# Altium PCB Predajnik.PcbDoc
Units mm, origin at the board's own origin, x right, y up, seen from the top; angles counter-clockwise.
Board outline 152.4 x 101.6 mm, 2 copper layers (Top Layer, Bottom Layer); 47 components, 29 nets, 158 pads, 4 vias.
Unrouted connection lines stored in the file: 2.
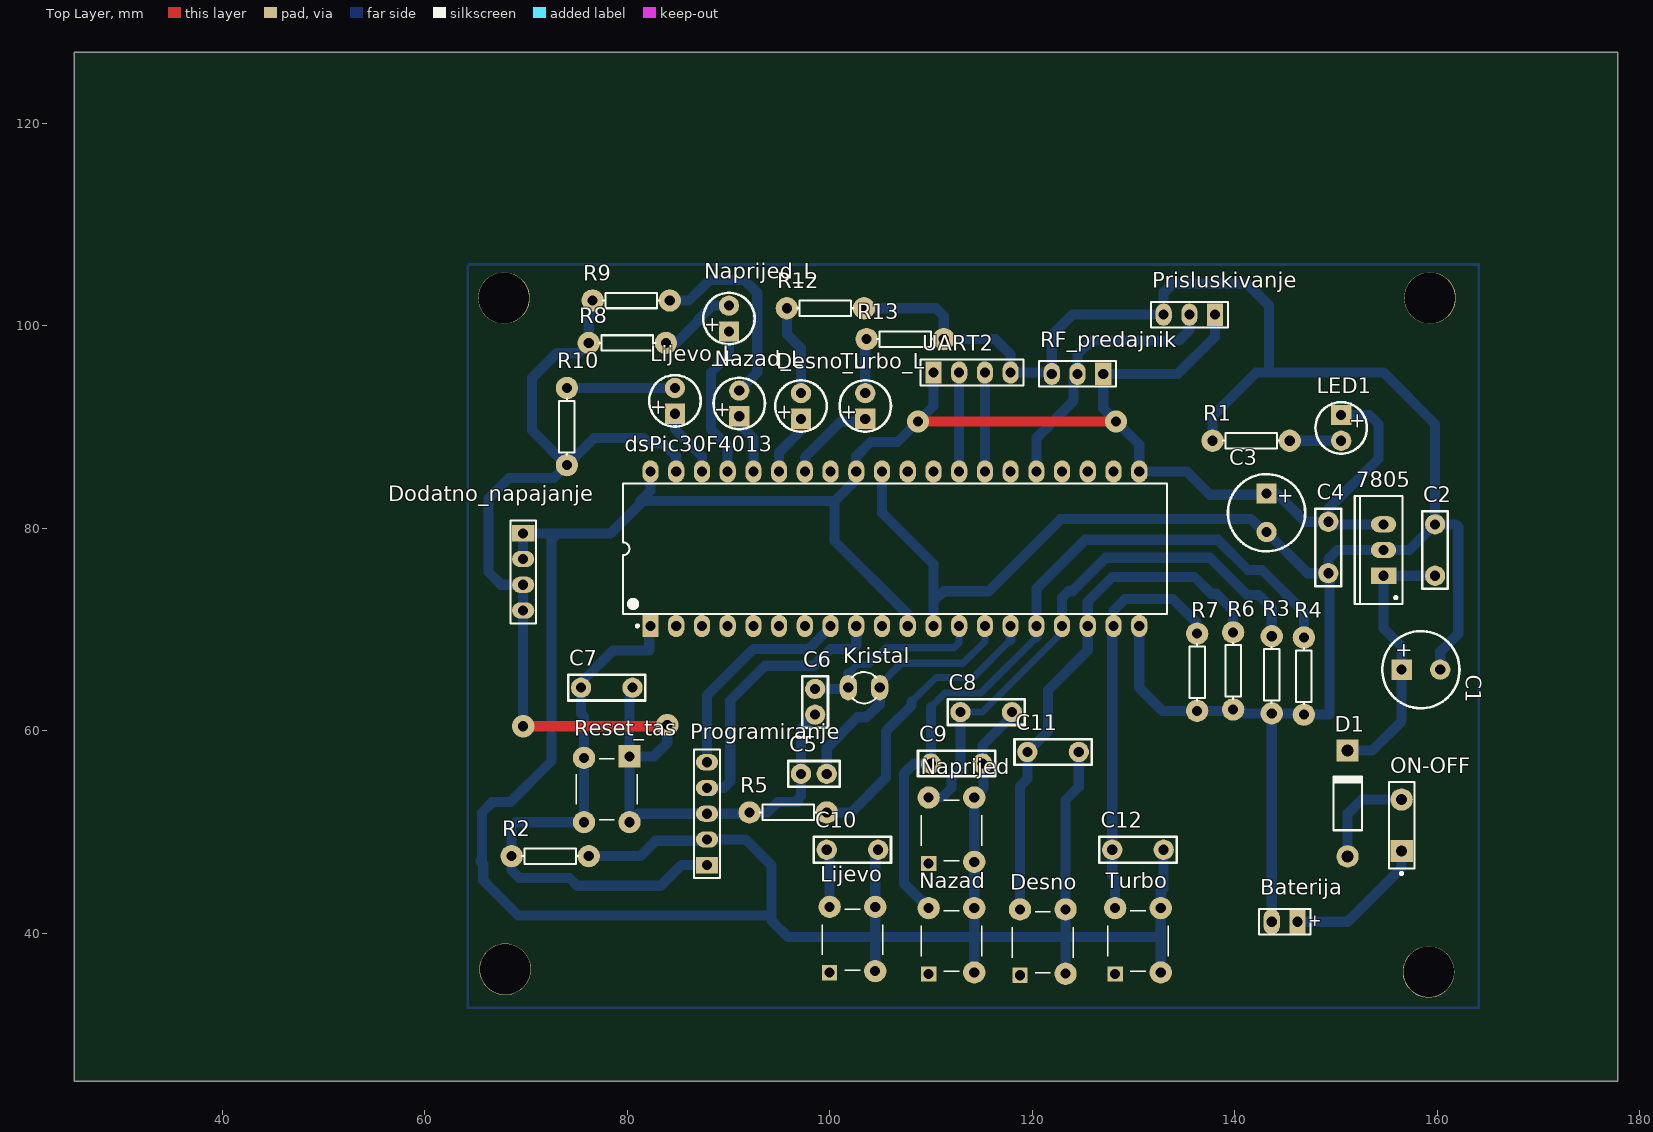
[diagram p0: Top Layer view]
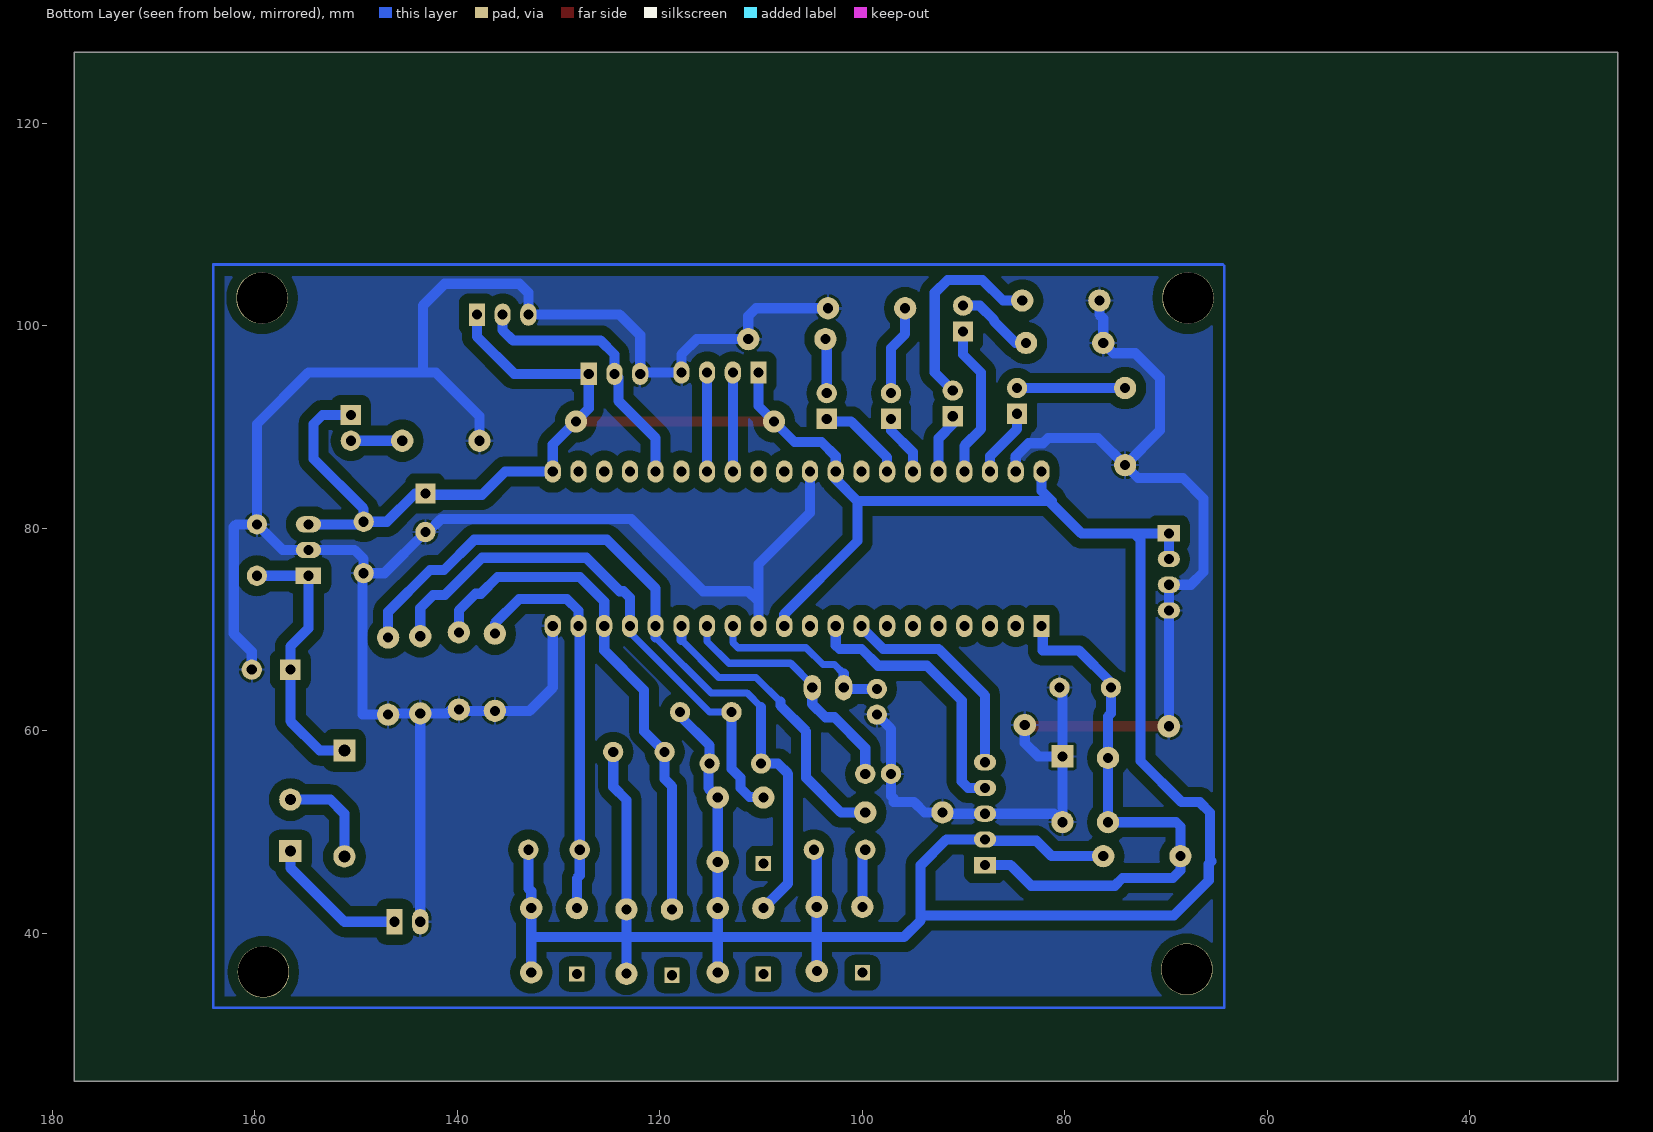
[diagram p1: Bottom Layer view, seen from below]

## Layer stack, top to bottom
Top Solder: solder mask 0.0102, Solder Resist, Dk 3.5
Top Layer: signal copper 0.0356
Dielectric 1: dielectric 0.32, FR-4, Dk 4.8
Bottom Layer: signal copper 0.0356
Bottom Solder: solder mask 0.0102, Solder Resist, Dk 3.5

## Board outline
25.4,25.4 177.8,25.4 177.8,127 25.4,127

## Design rules (kind name [scope] priority, off if disabled: settings)
Clearance [All vs InPolygon] p1: gap=1 ignorepadtopadclearanceinfootprint=FALSE
PolygonConnect [All] p1: connectstyle=Relief reliefconductorwidth=0.254 reliefentries=4 polygonreliefangle="90 Angle" airgapwidth=0.254
RoutingVias [All] p1: holewidth=0.711 width=1.27 viastyle="Through Hole" minholewidth=0.711 minwidth=1.27 maxholewidth=0.711 maxwidth=1.27
SolderMaskExpansion [All] p1: expansion=0.102
Width [InNetClass('All Nets')] p1: maxlimit=1.5 minlimit=0.4 preferedwidth=1
30 further rules are at their usual default settings.

## Components (designator, comment, footprint, x,y, rotation, side; value= is the part's Value field where it differs from the comment)
7805 "LM7805CT" T03B 154.686,77.851 r90 top
Baterija "9V" BAT-2 144.907,41.148 r180 top
C1 "470uF" "El. Kondenzator 470uf" 158.369,66.04 r0 top
C2 "100nF" "C blok 100n" 159.766,77.851 r90 top
C3 "470uF" "El. Kondenzator 470uf" 143.129,81.534 r270 top
C4 "100nF" "C blok 100n" 149.225,78.105 r270 top
C5 "33pF" "C keramicki 30pF" 98.425,55.753 r0 top
C6 "33pF" "C keramicki 30pF" 98.552,62.865 r90 top
C7 "100nF" "C blok 100n" 77.978,64.262 r0 top
C8 "100nF" "C blok 100n" 115.443,61.849 r180 top
C9 "100nF" "C blok 100n" 112.522,56.769 r180 top
C10 "100nF" "C blok 100n" 102.235,48.26 r180 top
C11 "100nF" "C blok 100n" 122.047,57.912 r180 top
C12 "100nF" "C blok 100n" 130.429,48.26 r180 top
D1 "1N4007" DO-41 151.13,52.832 r90 top
Desno "3-1825910-1" *TE_3-1825910-1#1 121.031,39.116 r90 top
Desno_L "LED0" LED_5mm 97.155,92.075 r90 top
Dodatno_napajanje "" HDR1X4 69.723,79.502 r270 top
dsPic30F4013 "DSPIC30F4013-20E/P" PDIP600-P40 106.426,77.978 r90 top
Kristal "10MHz" R38 103.378,64.262 r90 top
LED1 "LED_regulatora" LED_5mm 150.495,89.916 r270 top
Lijevo "3-1825910-1" *TE_3-1825910-1#1 102.235,39.37 r90 top
Lijevo_L "LED0" LED_5mm 84.709,92.583 r90 top
Naprijed "3-1825910-1" *TE_3-1825910-1#1 112.014,50.165 r90 top
Naprijed_L "LED0" LED_5mm 90.043,100.711 r90 top
Nazad "3-1825910-1" *TE_3-1825910-1#1 112.014,39.243 r90 top
Nazad_L "LED0" LED_5mm 91.059,92.329 r90 top
ON-OFF "Prekidac" SPST-2 156.464,50.673 r90 top
Prisluskivanje "Tx_na_Rx_MAX-a" HDR1X3 138.049,101.092 r180 top
Programiranje "Pinovi" HDR1X5 87.884,46.736 r90 top
R1 "660" AXIAL-0.3 141.605,88.646 r0 top
R2 "10k" AXIAL-0.3 72.39,47.625 r0 top value=10K
R3 "10k" AXIAL-0.3 143.637,65.532 r90 top value=10K
R4 "10k" AXIAL-0.3 146.812,65.405 r90 top value=10K
R5 "10k" AXIAL-0.3 95.885,51.943 r0 top value=10K
R6 "10k" AXIAL-0.3 139.827,65.913 r90 top value=10K
R7 "10k" AXIAL-0.3 136.271,65.786 r90 top value=10K
R8 "220" AXIAL-0.3 80.01,98.298 r180 top
R9 "220" AXIAL-0.3 80.391,102.489 r180 top
R10 "220" AXIAL-0.3 74.041,90.043 r270 top
R12 "220" AXIAL-0.3 99.568,101.727 r0 top
R13 "220" AXIAL-0.3 107.442,98.679 r0 top
Reset_tas "3-1825910-1" *TE_3-1825910-1#2 77.978,54.229 r270 top
RF_predajnik "Header 3" HDR1X3 127,95.25 r180 top
Turbo "3-1825910-1" *TE_3-1825910-1#1 130.429,39.243 r90 top
Turbo_L "LED0" LED_5mm 103.505,92.075 r90 top
UART2 "" HDR1X4 110.236,95.377 r0 top

## Footprints (in the part's own frame and the unit in brackets; to place one, negate y for a bottom-side part, rotate by r counter-clockwise, add the part's x,y. Pads: shape width x height; smd on the part's side, far side on the other; paste and mask are expansions set on the pad)
*TE_3-1825910-1#1 [mm]
  rect 1.498x1.498 hole 0.99: 1(-3.25,2.25)
  round 2.2 hole 1: 2(3.25,2.25) 4(3.25,-2.25)
  round 2.2 hole 0.99: 3(-3.1,-2.25)
  silkscreen extent -3,-3 3,3
*TE_3-1825910-1#2 [mm]
  rect 2.2x2.2 hole 0.99: 1(-3.25,2.25)
  round 2.2 hole 1: 2(3.25,2.25) 4(3.25,-2.25)
  round 2.2 hole 0.99: 3(-3.1,-2.25)
  silkscreen extent -3,-3 3,3
AXIAL-0.3 [mm] "Axial Device, Thru-Hole; 2 Leads; 0.3 in Pin Spacing"
  round 2.2 hole 1: 1(-3.81,0) 2(3.81,0)
  silkscreen extent -2.77,-0.76 2.77,0.76
BAT-2 [mm] "Battery; 2 Leads"
  rect 1.6x2.5 hole 1: 1(-1.27,0)
  oval 1.6x2.5 hole 1: 2(1.27,0)
  silkscreen extent -2.54,-1.27 2.54,1.27
"C blok 100n" [mm]
  round 2 hole 1: 1(2.54,0) 2(-2.54,0)
  silkscreen extent -3.81,-1.27 3.81,1.27
"C keramicki 30pF" [mm]
  round 2 hole 1: 1(-1.27,0) 2(1.27,0)
  silkscreen extent -2.54,-1.27 2.54,1.27
DO-41 [mm] "Diode, Axial; Body 5.2 x 2.7 mm (LxDia. max), Lead Dia. 0.86 mm (max)"
  round 2.2 hole 1.2 unplated: 1(-5.23,0)
  rect 2.2x2.2 hole 1.2 unplated: 2(5.23,0)
  silkscreen extent -2.65,-1.4 2.75,1.4
"El. Kondenzator 470uf" [mm]
  rect 2x2 hole 1: 1(-1.905,0)
  round 2 hole 1: 2(1.905,0)
  silkscreen extent -3.81,-3.81 3.81,3.81
HDR1X3 [mm] "Connector; Header; 3 Position"
  rect 1.6x2.2 hole 1: 1(0,0)
  oval 1.6x2.2 hole 1: 2(2.54,0) 3(5.08,0)
  silkscreen extent -1.27,-1.27 6.35,1.27
HDR1X4 [mm] "Connector; Header; 4 Position"
  rect 1.6x2.2 hole 1: 1(0,0)
  oval 1.6x2.2 hole 1: 2(2.54,0) 3(5.08,0) 4(7.62,0)
  silkscreen extent -1.27,-1.27 8.89,1.27
HDR1X5 [mm] "Connector; Header; 5 Position"
  rect 1.6x2.2 hole 1: 1(0,0)
  oval 1.6x2.2 hole 1: 2(2.54,0) 3(5.08,0) 4(7.62,0) 5(10.16,0)
  silkscreen extent -1.27,-1.27 11.43,1.27
LED_5mm [mm]
  rect 2x2 hole 1: 1(-1.27,0)
  round 2 hole 1: 2(1.27,0)
  silkscreen extent -2.54,-2.54 2.54,2.54
PDIP600-P40 [mm] "DIP, 40-Leads, Row Spacing 15.24mm, Pitch 2.54mm, Body 51.8x13.5mm"
  rect 2.2x1.6 hole 1: 1(-7.62,24.13)
  oval 2.2x1.6 hole 1: 2(-7.62,21.59) 3(-7.62,19.05) 4(-7.62,16.51) 5(-7.62,13.97) 6(-7.62,11.43) 7(-7.62,8.89) 8(-7.62,6.35) 9(-7.62,3.81) 10(-7.62,1.27) 11(-7.62,-1.27) 12(-7.62,-3.81) 13(-7.62,-6.35) 14(-7.62,-8.89) 15(-7.62,-11.43) 16(-7.62,-13.97) 17(-7.62,-16.51) 18(-7.62,-19.05) 19(-7.62,-21.59) 20(-7.62,-24.13) 21(7.62,-24.13) 22(7.62,-21.59) 23(7.62,-19.05) 24(7.62,-16.51) 25(7.62,-13.97) 26(7.62,-11.43) 27(7.62,-8.89) 28(7.62,-6.35) 29(7.62,-3.81) 30(7.62,-1.27) 31(7.62,1.27) 32(7.62,3.81) 33(7.62,6.35) 34(7.62,8.89) 35(7.62,11.43) 36(7.62,13.97) 37(7.62,16.51) 38(7.62,19.05) 39(7.62,21.59) 40(7.62,24.13)
  silkscreen extent -7.74,-26.85 6.45,26.85, body extent -7.3,-26.85 7.3,26.85, height 6.35
R38 [mm] "Crystal, Thru-Hole; 2 Leads; Body 3.1 x 8.2 mm (Dia.xH)"
  oval 2.5x1.7 hole 1: 1(0,1.55) 2(0,-1.55)
  silkscreen extent -1.55,-1.19 1.55,1.17
SPST-2 [mm] "Switch; 2 Leads"
  rect 2.2x2.2 hole 1.1: 1(-2.54,0)
  round 2.2 hole 1.1: 2(2.54,0)
  silkscreen extent -4.89,-1.27 4.28,1.27
T03B [mm] "TO, Thru-Hole, Vertical, Heatsink Mounted; 3 In-Line Leads; Pitch 2.54 mm"
  rect 1.6x2.5 hole 1: 1(-2.54,0)
  oval 1.6x2.5 hole 1: 2(0,0) 3(2.54,0)
  silkscreen extent -5.35,-1.85 5.35,2.85, body extent -5.4,-1.9 5.4,2.9, height 19.4

## Part data
7805: library part LM7905CT, "3-Terminal Negative Regulator, 3-pin TO-220", Manufacturer="National Semiconductor", PackageTopMarking=NSUZXYTTE#*LM7905CT, PowerWise=N, Supplier Part Number 1=9490370, ComponentLink1Description="LM7905 Datasheet", ComponentLink1URL=http://www.national.com/ds/LM/LM7905.pdf, ComponentLink2Description="LM7905 Web Page", ComponentLink2URL=http://www.national.com/pf/LM/LM7905.html, ComponentLink3Description="T03B Package Page", ComponentLink3URL=http://www.national.com/packaging/folders/t03b.html, CompType="LDO IC", DatasheetVersion=Sep-2001, PackageDescription="TO-220, Molded, 3 Lead, Straight", PackageReference=T03B, PackageVersion="revL, Jan-1992", PartNumber=LM7905CT, PinCount=3, Published=4-Dec-2008, Publisher="Altium Limited", RoHS=N, Supplier 1=Farnell
Baterija: library part Battery, "Multicell Battery", LatestRevisionDate=17-Jul-2002, LatestRevisionNote="Re-released for DXP Platform.", PackageDescription="Battery; 2 Leads", PackageReference=BAT-2, Published=24-Mar-1999, Publisher="Altium Limited"
C1 C3: library part "Cap Pol1", "Polarized Capacitor (Radial)", LatestRevisionDate=17-Jul-2002, LatestRevisionNote="Re-released for DXP Platform.", PackageDescription="Polarized Capacitor (Radial); 2 Leads", PackageReference=RB7.6-15, Published=8-Jun-2000, Publisher="Altium Limited"
C2 C4 C5 C6 C7 C8 C9 C10 C11 C12: library part Cap, "Capacitor", LatestRevisionDate=17-Jul-2002, LatestRevisionNote="Re-released for DXP Platform.", PackageDescription="Radial Cap, Thru-Hole; 2 Leads; 0.3 in Pin Spacing", PackageReference=RAD-0.3, Published=8-Jun-2000, Publisher="Altium Limited"
D1: library part "Diode 1N4007", "1 Amp General Purpose Rectifier", Code_JEDEC=DO-204-AL, ComponentLink1Description="Manufacturer Link", ComponentLink1URL=http://www.fairchildsemi.com/, ComponentLink2Description=Datasheet, ComponentLink2URL=http://www.fairchildsemi.com/ds/1N%2F1N4001.pdf, DatasheetVersion=1998, LatestRevisionDate=17-Jul-2002, LatestRevisionNote="Re-released for DXP Platform.", PackageDescription="Diode, Axial; Body 5.2 x 2.7 mm (LxDia. max), Lead Dia. 0.86 mm (max)", PackageReference=DO-41, PackageVersion=Aug-1999, Published=8-Jun-2000, Publisher="Altium Limited"
Desno Lijevo Naprijed Nazad Reset_tas Turbo: "Switch Push Button OFF _ON_ SPST Round Button 0.05A 24VDC Momentary Contact PC Pins Thru-Hole", Package=None, Availability=Unavailable, EU_RoHS_Compliance=Compliant, MF="TE Connectivity", MP=3-1825910-1, Price=None, SnapEDA_Link=https://www.snapeda.com/parts/3-1825910-1/TE%20Connectivity%20ALCOSWITCH%20Switches/view-part/452461/?ref=snap, TE_purchase_URL=https://www.te.com/usa-en/product-3-1825910-1.html?te_bu=Cor&te_type=disp&te_campaign=seda_glo_cor-seda-global-disp-prtnr-fy19-seda-model-bom-cta_sma-317_1&elqCampaignId=32493
Desno_L Lijevo_L Naprijed_L Nazad_L Turbo_L: "Typical INFRARED GaAs LED", LatestRevisionDate=08-Jul-2005, LatestRevisionNote="Mech Layer 1 removed.", PackageDescription="LED; 2 Leads", PackageReference=LED-0, Published=8-Jun-2000, Publisher="Altium Limited"
Dodatno_napajanje Prisluskivanje UART2: library part "Header 4", "Header, 4-Pin", LatestRevisionDate=17-Jul-2002, LatestRevisionNote="Re-released for DXP Platform.", Publisher="Altium Limited"
dsPic30F4013: "High-Performance 16-bit Digital Signal Controller, 48 KB Flash, 2 KB SRAM, 1 KB EEPROM, 40-Pin PDIP, Extended High Temperature", Supplier Part Number 1=DSPIC30F4013-20EP-ND, ComponentLink1Description=Datasheet, ComponentLink1URL=http://ww1.microchip.com/downloads/en/DeviceDoc/70138F.pdf, ComponentLink2Description="Packaging Specification", ComponentLink2URL=http://www.microchip.com/stellent/groups/techpub_sg/documents/packagingspec/en012702.pdf, ComponentLink3Description="Microchip.com Home", ComponentLink3URL=http://www.microchip.com/, DatasheetVersion="revF, Apr-2008", PackageDescription="40-Lead Plastic Dual In-Line (P) - 600 mil Body [PDIP]", PackageReference=PDIP600-P40, PackageVersion="revBB, Aug-2009", Published=29-Jan-2009, Publisher="Altium Limited", Supplier 1=Digi-Key
Kristal: library part XTAL, "Crystal Oscillator", LatestRevisionDate=17-Jul-2002, LatestRevisionNote="Re-released for DXP Platform.", PackageDescription="Crystal, Thru-Hole; 2 Leads; Body 3.1 x 8.2 mm (Dia.xH)", PackageReference=R38, Published=8-Jun-2000, Publisher="Altium Limited"
LED1: library part LED1, "Typical RED GaAs LED", LatestRevisionDate=08-Jul-2005, LatestRevisionNote="Mech Layer 1 removed.", PackageDescription="LED; 2 Leads", PackageReference=LED-1, Published=8-Jun-2000, Publisher="Altium Limited"
ON-OFF: library part SW-PB, "Switch", LatestRevisionDate=17-Jul-2002, LatestRevisionNote="Re-released for DXP Platform.", PackageDescription="Switch; 2 Leads", PackageReference=SPST-2, Published=24-Mar-1999, Publisher="Altium Limited"
Programiranje: library part "Header 5", "Header, 5-Pin", LatestRevisionDate=17-Jul-2002, LatestRevisionNote="Re-released for DXP Platform.", Publisher="Altium Limited"
R1 R2 R3 R4 R5 R6 R7 R8 R9 R10 R12 R13: library part Res1, "Resistor", LatestRevisionDate=17-Jul-2002, LatestRevisionNote="Re-released for DXP Platform.", PackageDescription="Axial Device, Thru-Hole; 2 Leads; 0.3 in Pin Spacing", PackageReference=AXIAL-0.3, Published=8-Jun-2000, Publisher="Altium Limited"
RF_predajnik: "Header, 3-Pin", LatestRevisionDate=17-Jul-2002, LatestRevisionNote="Re-released for DXP Platform.", Publisher="Altium Limited"

## Free pads (board coordinates)
  round 5.1 hole 5 unplated: 2(159.258,102.743) 3(67.818,102.743) 4(67.945,36.449) 5(159.131,36.195)

## Via types
v1: diameter 2.2, hole 1, Top Layer to Bottom Layer, 4 vias

## Nets (pads, with @x,y where several pads share a name; then routed paths per layer and width w, separated by ;. In a path a pad name is that pad's centre, name@x,y a point inside that pad or via, vN(x,y) a via of type N, cw(c..) or ccw(c..) an arc to the next point about the centre after c; other vN are vias at no path point)
GND: 7805.2 Baterija.2 C1.2 C2.1 C3.2 C4.1 C5.1 C6.1 C7.1 Dodatno_napajanje.3 Dodatno_napajanje.4 dsPic30F4013.12 dsPic30F4013.20 dsPic30F4013.31 dsPic30F4013.39 Prisluskivanje.3 Programiranje.3 R1.1 R3.1 R4.1 R5.1 R6.1 R7.1 R8.2 R9.2 R10.2 R12.2 R13.2 Reset_tas.1 Reset_tas.2 RF_predajnik.3 UART2.4 | length 381.6
  Top Layer w1: v1(69.723,60.452) 83.82,60.452 v1(83.947,60.579)
  Bottom Layer w1: v1(69.723,60.452) Dodatno_napajanje.4 Dodatno_napajanje.3 67.564,74.422 66.294,75.692 66.294,82.931 68.326,84.963 72.771,84.963 R10.2 ; R9.2 76.581,101.092 76.2,100.711 R8.2 75.184,97.282 73.025,97.282 70.612,94.869 70.612,89.662 R10.2 ; C7.1 80.228,63.972 Reset_tas.1 ; v1(83.947,60.579) 83.947,58.801 82.625,57.479 Reset_tas.1 ; dsPic30F4013.39 84.836,87.122 83.566,88.392 82.169,88.392 81.661,88.9 76.708,88.9 R10.2 ; C6.1 97.155,60.198 C5.1 97.155,53.594 96.901,53.34 96.901,52.959 94.869,52.959 93.853,51.943 R5.1 91.948,51.816 Programiranje.3 81.065,51.816 Reset_tas.2 Reset_tas.1 ; R12.2 110.49,101.727 111.252,100.965 R13.2 116.332,98.679 117.856,97.155 UART2.4 121.793,95.377 RF_predajnik.3 121.92,99.06 123.952,101.092 Prisluskivanje.3 132.969,103.251 133.858,104.14 141.224,104.14 143.383,101.981 143.383,95.504 143.51,95.377 ; dsPic30F4013.31 105.156,81.534 110.236,76.454 110.236,72.771 ; dsPic30F4013.12 110.236,72.771 ; dsPic30F4013.20 130.556,64.262 132.842,61.976 R7.1 139.7,61.976 R6.1 140.589,62.103 140.97,61.722 R3.1 ; R1.1 137.795,91.059 142.113,95.377 143.51,95.377 ; Baterija.2 R3.1 ; C1.2 160.274,67.818 162.052,69.596 162.052,80.137 161.798,80.391 C2.1 ; 110.236,72.771 111.252,73.787 115.697,73.787 122.809,80.899 141.605,80.899 142.875,79.629 C3.2 147.193,75.565 C4.1 ; 143.51,95.377 154.686,95.377 159.766,90.297 C2.1 ; R3.1 146.685,61.722 R4.1 149.352,61.595 149.352,75.438 C4.1 ; C4.1 149.225,76.962 150.114,77.851 7805.2 157.226,77.851 C2.1
MCLR: C7.2 dsPic30F4013.1 Programiranje.1 R2.1 Reset_tas.3 Reset_tas.4 | length 57.5
  Bottom Layer w1: Reset_tas.3@75.549,57.15 Reset_tas.3 ; dsPic30F4013.1 82.169,70.231 82.169,67.945 78.613,67.945 75.438,64.77 C7.2 75.438,61.722 75.728,61.432 Reset_tas.3 ; Programiranje.1@87.63,46.482 Programiranje.1 85.344,46.736 83.312,44.704 75.057,44.704 74.295,45.466 69.342,45.466 68.58,46.228 R2.1 68.58,50.546 69.013,50.979 Reset_tas.4 Reset_tas.3
Net7805_1: 7805.1 C1.1 C2.2 D1.2 | length 26.7
  Bottom Layer w1: D1.2 153.566,58.062 156.464,60.96 C1.1 156.464,68.326 154.686,70.104 7805.1 C2.2
NetBaterija_1: Baterija.1 ON-OFF.1 | length 14.1
  Bottom Layer w1: Baterija.1 151.13,41.148 156.464,46.482 ON-OFF.1
NetD1_1: D1.1 ON-OFF.2 | length 10.1
  Bottom Layer w1: D1.1 151.13,51.816 152.527,53.213 ON-OFF.2
NetDesno_L_2: Desno_L.2 R12.1 | length 9
  Bottom Layer w1: R12.1 95.758,99.187 97.155,97.79 Desno_L.2
NetLED1_2: LED1.2 R1.2 | length 5.1
  Bottom Layer w1: R1.2 LED1.2
NetLijevo_L_2: Lijevo_L.2 R10.1 | length 10.7
  Bottom Layer w1: R10.1 Lijevo_L.2
NetNaprijed_L_2: Naprijed_L.2 R8.1 | length 7.8
  Bottom Layer w1: R8.1 84.836,98.298 86.995,100.457 86.995,100.584 88.392,101.981 Naprijed_L.2
NetNazad_L_2: Nazad_L.2 R9.1 | length 20.4
  Bottom Layer w1: R9.1 86.106,102.489 88.138,104.521 91.567,104.521 92.837,103.251 92.837,95.377 Nazad_L.2
NetR13_1: R13.1 Turbo_L.2 | length 5.4
  Bottom Layer w1: Turbo_L.2 103.505,98.552 R13.1
OSC1: C6.2 dsPic30F4013.13 Kristal.1 | length 18.6
  Bottom Layer w0.7: 101.828,65.633 102.743,66.548 103.886,66.548 105.537,68.199 112.268,68.199 112.776,68.707 dsPic30F4013.13
  Bottom Layer w1: C6.2 101.701,64.135 Kristal.1 101.828,65.633
OSC2: C5.2 dsPic30F4013.14 Kristal.2 | length 25.2
  Bottom Layer w0.7: Kristal.2@104.928,64.542 107.061,66.675 113.157,66.675 115.316,68.834 dsPic30F4013.14
  Bottom Layer w1: C5.2 99.695,58.293 102.743,61.341 103.632,61.341 104.928,62.637 Kristal.2 Kristal.2@104.928,64.542
PGC: dsPic30F4013.8 Programiranje.5 | length 21.7
  Bottom Layer w1: Programiranje.5 87.884,63.5 92.456,68.072 97.917,68.072 100.076,70.231 dsPic30F4013.8
PGD: dsPic30F4013.9 Programiranje.4 | length 27.2
  Bottom Layer w1: Programiranje.4 89.535,54.356 90.17,54.991 90.17,62.992 93.599,66.421 98.425,66.421 100.076,68.072 102.235,68.072 102.616,68.453 dsPic30F4013.9
RA11: C8.1 dsPic30F4013.17 Naprijed.2 R3.2 | length 54.8
  Bottom Layer w0.7: C8.1 115.062,61.849 dsPic30F4013.17@122.936,69.723
  Bottom Layer w1: Naprijed.2@110.184,53.415 Naprijed.2 109.816,53.467 111.125,53.467 112.014,54.356 112.014,55.372 112.903,56.261 C8.1 ; dsPic30F4013.17@122.936,69.723 dsPic30F4013.17 122.936,73.152 123.571,73.787 123.952,73.787 127.254,77.089 137.541,77.089 141.224,73.406 142.367,73.406 143.637,72.136 R3.2
RB9: dsPic30F4013.38 Lijevo_L.1 | length 6.8
  Bottom Layer w1: Lijevo_L.1 84.709,89.789 87.376,87.122 dsPic30F4013.38
RB10: dsPic30F4013.37 Naprijed_L.1 | length 15.3
  Bottom Layer w1: dsPic30F4013.37 89.916,88.138 88.265,89.789 88.265,95.377 90.043,97.155 Naprijed_L.1
RB11: dsPic30F4013.36 Nazad_L.1 | length 6
  Bottom Layer w1: Nazad_L.1 91.059,90.297 92.456,88.9 dsPic30F4013.36
RB12: Desno_L.1 dsPic30F4013.35 | length 6.1
  Bottom Layer w1: dsPic30F4013.35 94.996,87.503 97.155,89.662 Desno_L.1
RC13: C10.1 dsPic30F4013.15 Lijevo.2 R5.2 | length 35.3
  Bottom Layer w0.7: 108.077,62.865 110.49,65.278 114.168,65.278 117.856,68.966
  Bottom Layer w1: C10.1 99.985,47.97 Lijevo.2 ; R5.2 102.108,51.943 105.537,55.372 105.537,59.944 108.077,62.484 108.077,62.865 ; 117.856,68.966 dsPic30F4013.15
RC14: C9.1 dsPic30F4013.16 Nazad.2 R4.2 | length 75.5
  Bottom Layer w0.7: 109.982,62.357 111.379,63.754 114.935,63.754 120.396,69.215
  Bottom Layer w1: Nazad.2 107.315,44.942 107.315,55.753 108.331,56.769 C9.1 109.982,62.357 ; 120.396,69.215 dsPic30F4013.16 120.396,74.041 125.222,78.867 138.303,78.867 141.287,75.882 142.684,75.882 146.812,71.755 R4.2 R4.2@146.431,69.596
RD0: dsPic30F4013.34 Turbo_L.1 | length 8.9
  Bottom Layer w1: dsPic30F4013.34 97.536,86.995 101.092,90.551 103.251,90.551 Turbo_L.1
RD3: C12.1 dsPic30F4013.19 R7.2 Turbo.2 | length 40.3
  Bottom Layer w1: Turbo.2 128.179,45.43 127.889,45.72 C12.1 127.889,70.231 dsPic30F4013.19 128.016,71.882 129.159,73.025 133.858,73.025 136.271,70.612 R7.2
RD9: C11.1 Desno.2 dsPic30F4013.18 R6.2 | length 52.1
  Bottom Layer w1: Desno.2 118.781,54.519 119.507,55.245 C11.1 121.539,59.944 121.539,64.008 125.476,67.945 dsPic30F4013.18 125.476,72.771 127.889,75.184 136.017,75.184 137.668,73.533 138.176,73.533 139.827,71.882 R6.2
RF4: dsPic30F4013.28 UART2.2 | length 9.8
  Bottom Layer w1: dsPic30F4013.28 UART2.2
RF5: dsPic30F4013.27 UART2.3 | length 9.8
  Bottom Layer w1: dsPic30F4013.27 UART2.3
U1Tx/RF3: dsPic30F4013.25 Prisluskivanje.2 RF_predajnik.2 | length 26.8
  Bottom Layer w1: dsPic30F4013.25 120.396,88.9 124.079,92.583 124.079,94.869 RF_predajnik.2 124.46,97.155 125.857,98.552 134.493,98.552 135.509,99.568 Prisluskivanje.2
VDD: 7805.3 C3.1 C4.2 C8.2 C9.2 C10.2 C11.2 C12.2 Desno.3 Desno.4 Dodatno_napajanje.1 Dodatno_napajanje.2 dsPic30F4013.11 dsPic30F4013.21 dsPic30F4013.32 dsPic30F4013.40 LED1.1 Lijevo.3 Lijevo.4 Naprijed.3 Naprijed.4 Nazad.3 Nazad.4 Prisluskivanje.1 Programiranje.2 R2.2 RF_predajnik.1 Turbo.3 Turbo.4 UART2.1 | length 366.3
  Top Layer w1: v1(108.712,90.551) v1(128.27,90.551)
  Bottom Layer w1: Dodatno_napajanje.2 Dodatno_napajanje.1 73.152,79.502 ; R2.2 81.28,47.625 82.804,49.149 87.757,49.149 Programiranje.2 91.694,49.276 94.234,46.736 94.234,41.783 ; dsPic30F4013.40 82.296,83.693 81.28,82.677 ; Lijevo.3 104.485,39.624 ; C10.2 104.485,47.97 Lijevo.4 104.485,39.624 ; dsPic30F4013.11 107.696,71.501 100.457,78.74 100.457,82.677 ; UART2.1 110.236,92.075 v1(108.712,90.551) 106.68,88.519 104.013,88.519 102.616,87.122 dsPic30F4013.32 102.616,84.836 100.457,82.677 ; Nazad.3 114.264,39.624 ; C8.2 117.983,61.468 115.062,58.547 C9.2 115.189,56.642 115.189,54.34 Naprijed.4 Naprijed.3 Nazad.4 114.264,39.624 ; Desno.3 123.281,39.624 ; C11.2 124.587,54.483 123.281,53.177 Desno.4 123.281,39.624 ; Turbo.3 132.679,39.497 ; C12.2 132.969,44.45 132.679,44.16 Turbo.4 132.679,39.497 ; Prisluskivanje.1 138.049,98.933 134.366,95.25 RF_predajnik.1 127,91.821 v1(128.27,90.551) 130.556,88.265 dsPic30F4013.21 135.255,85.598 137.541,83.312 143.002,83.312 C3.1 144.145,83.439 146.939,80.645 C4.2 ; LED1.1 153.289,91.186 154.178,90.297 154.178,86.868 149.225,81.915 C4.2 ; 7805.3 149.479,80.391 C4.2 ; 73.152,79.502 78.359,79.502 81.28,82.423 81.28,82.677 ; 73.152,79.502 72.517,78.867 72.517,57.023 68.453,52.959 66.675,52.959 65.659,51.943 65.659,47.244 65.532,47.117 65.786,46.863 65.786,45.212 69.215,41.783 94.234,41.783 ; 81.28,82.677 100.457,82.677 ; 94.234,41.783 94.234,41.275 95.885,39.624 104.485,39.624 ; 104.485,39.624 114.264,39.624 ; 114.264,39.624 123.281,39.624 ; 123.281,39.624 132.552,39.624 132.679,39.497
pads on no net: Desno.1 dsPic30F4013.2 dsPic30F4013.3 dsPic30F4013.4 dsPic30F4013.5 dsPic30F4013.6 dsPic30F4013.7 dsPic30F4013.10 dsPic30F4013.22 dsPic30F4013.23 dsPic30F4013.24 dsPic30F4013.26 dsPic30F4013.29 dsPic30F4013.30 dsPic30F4013.33 Lijevo.1 Naprijed.1 Nazad.1 Turbo.1
copper on no net: | length 346.8
  Top Layer w0.254: 84.836,70.058 84.836,70.358
  Bottom Layer w0.254: 64.262,105.918 64.262,104.521 64.262,34.036 64.262,32.639 65.659,32.639 164.084,32.639 164.084,39.259 164.084,44.625 164.084,52.768 164.084,85.915 164.084,106.045 65.786,106.045 64.389,106.045 ; 94.996,70.058 94.996,70.358

## Polygon pours and split planes (outlines as drawn)
GND on Bottom Layer "Bottom Layer-No Net" (solid, pour order 0): 64.262,105.918 64.389,106.045 164.084,106.045 164.084,32.639 64.262,32.639

## Text inside footprints (layer, text, board x,y; h text height)
Baterija: Top Overlay "+" at 148.577,41.725 h1.15 r180
C1: Top Overlay "+" at 155.829,67.31 h1.52
C3: Top Overlay "+" at 144.399,84.074 h1.52 r270
Desno_L: Top Overlay "+" at 96.139,90.551 h1.52 r90
LED1: Top Overlay "+" at 151.511,91.44 h1.52 r270
Lijevo_L: Top Overlay "+" at 83.693,91.059 h1.52 r90
Naprijed_L: Top Overlay "+" at 89.027,99.187 h1.52 r90
Nazad_L: Top Overlay "+" at 90.043,90.805 h1.52 r90
Turbo_L: Top Overlay "+" at 102.489,90.551 h1.52 r90